# Altium PCB fat94.PcbDoc
Units mm, origin at the board's own origin, x right, y up, seen from the top; angles counter-clockwise.
Board outline 354.7 x 156.7 mm, 2 copper layers (Top Layer, Bottom Layer); 41 components, 615 nets, 130 pads, 52 vias.
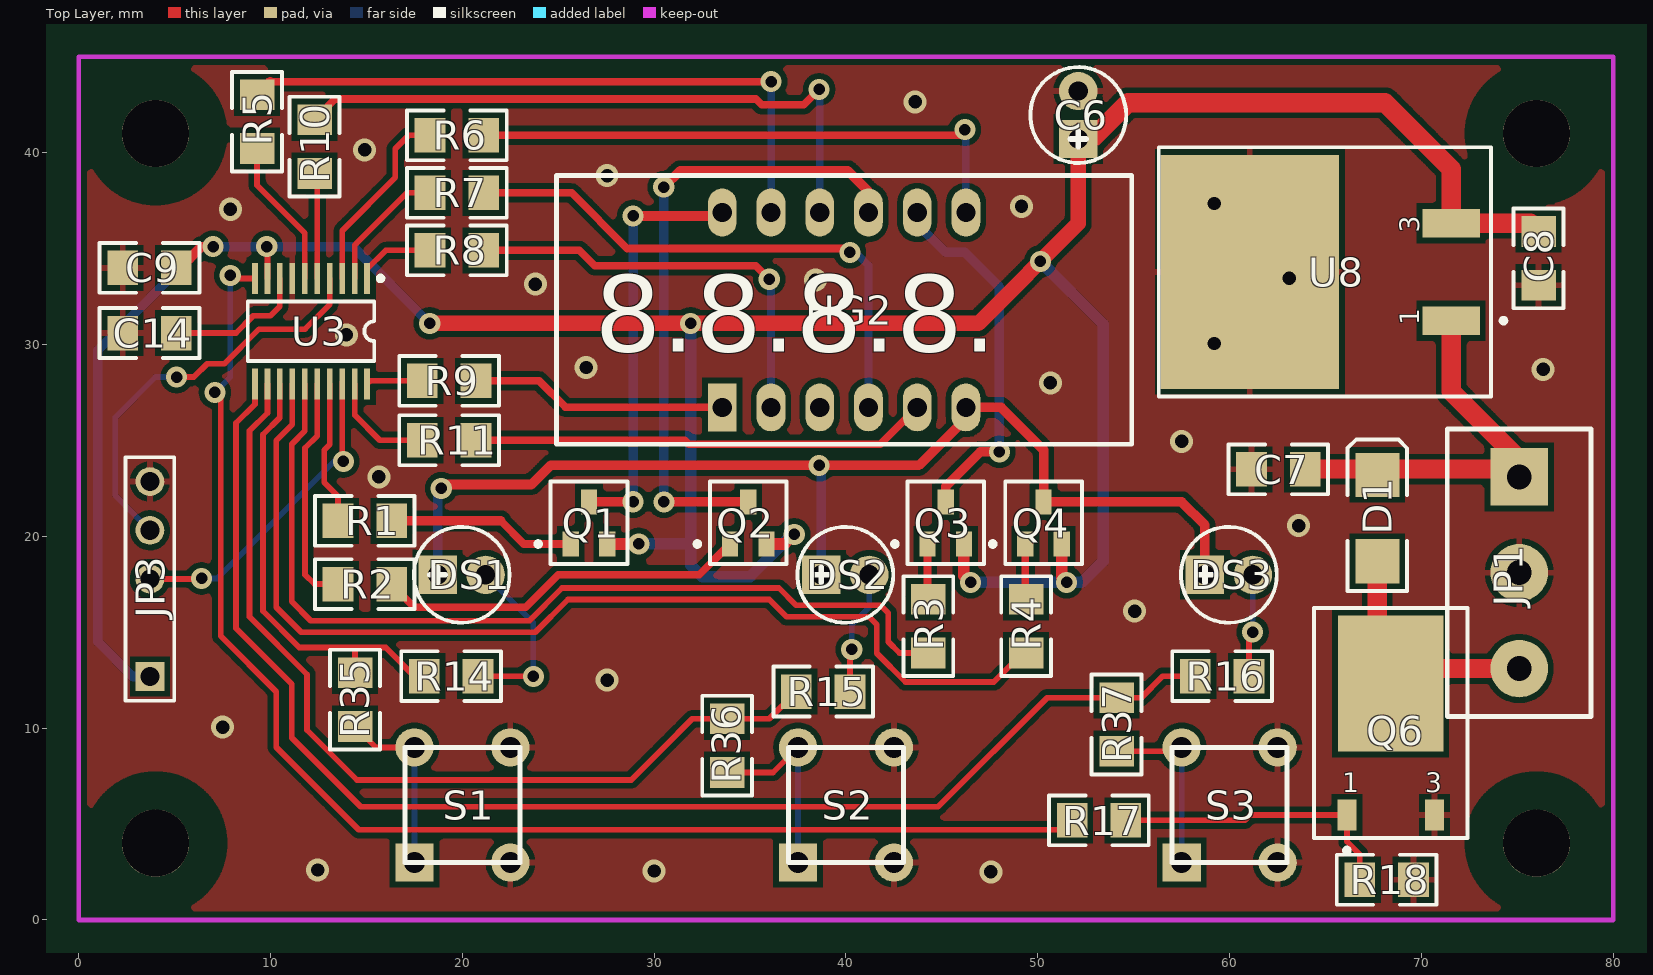
[diagram p0: Top Layer view]
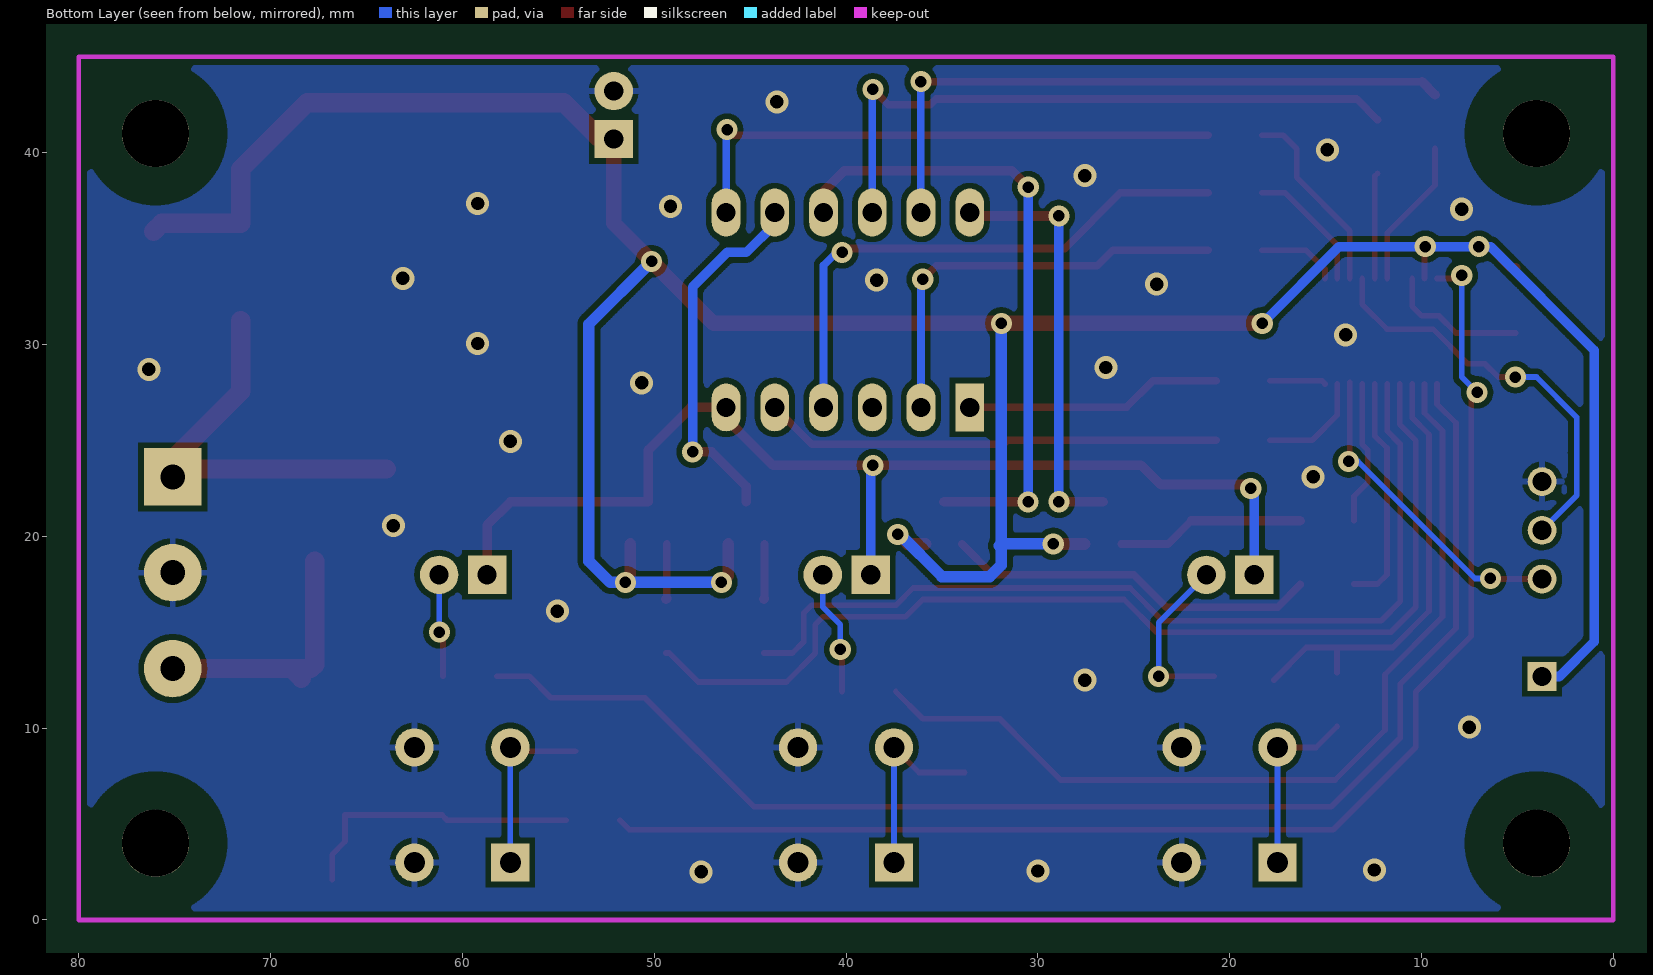
[diagram p1: Bottom Layer view, seen from below]

## Layer stack, top to bottom
Top Layer: signal copper 0.0356
Dielectric: dielectric 0.32, FR-4, Dk 4.8
Bottom Layer: signal copper 0.0356

## Board outline
-43.5,120.65 -43.5,-36.05 310.5,-36.05 310.5,116.5 -43.85,116.5 -43.85,-36.05 -44.2,-36.05

## Design rules (kind name [scope] priority, off if disabled: settings)
Clearance Clearance_1 [InPoly vs HasPad('Free-0')] p1: gap=2
Clearance Keep_Out [OnLayer('Keep-Out Layer')] p2: gap=0.3
Clearance Poly [InPoly] p3: gap=0.3
Clearance [All] p4: gap=0.2
ComponentClearance [All] p1: gap=0.254 collisioncheckmode=0
HoleSize [All] p1: absolutevalues=TRUE maxlimit=5 minlimit=0.025 maxpercent=80.000 minpercent=20.000
PolygonConnect PolygonConnect_1 [InComponent(U2)] p1: connectstyle=Direct reliefconductorwidth=0.254 reliefentries=4 polygonreliefangle="90 Angle"
PolygonConnect [All] p2: connectstyle=Relief reliefconductorwidth=0.3 reliefentries=4 polygonreliefangle="90 Angle"
RoutingLayers [All] p1: top layer=Horizontal bottom layer=Vertical
RoutingVias [All] p1: holewidth=0.6 width=1.1 viastyle="Through Hole" minholewidth=0.6 minwidth=1.1 maxholewidth=0.7 maxwidth=1.2
SolderMaskExpansion [All] p1: expansion=0.102
TestPointUsage [All] p1: valid=0 allowmultiple=FALSE
Testpoint [All] p1: side=15 testpointundercomponent=TRUE minsize=1.016 maxsize=2.54 preferedsize=1.524 minholesize=0 maxholesize=1.016 preferedholesize=0.813 testpointgrid=0.025 style=1023 order=1234567890
Width [All] p1: maxlimit=2 minlimit=0.2 preferedwidth=0.254 toplayer_prefwidth=0.4 bottomlayer_prefwidth=0.6 minimp=50.000000 maximp=50.000000 favimp=50.000000
15 further rules are at their usual default settings.

## Components (designator, comment, footprint, x,y, rotation, side; value= is the part's Value field where it differs from the comment)
C6 "" el3 52.1,40.7 r90 top
C7 "1.0 x 25" _1206 62.55,23.5 r0 top
C8 "20.0 x 25" _1206 76.1,34.5 r90 top
C9 "20.0 x 25" _1206 3.7,34 r0 top
C14 "1.0 x 25" _1206 3.7,30.6 r0 top
D1 "STPS1H100" DSO-C2/X2.3 67.7,20.95 r90 top
DS1 "LED0" el3 18.7,18 r0 top
DS2 "LED0" el3 38.7,18 r0 top
DS3 "LED0" el3 58.7,18 r0 top
HG2 "HS410561K" KEM-3461BS 39.9,31.8 r0 top
JP1 "Header 3" BT5-3 75.1,23.1 r270 top
JP3 "" HDR1X5_uart 3.7,12.7 r90 top
Q1 "BC807" SO-G3 26.6,20.7 r0 top
Q2 "BC807" SO-G3 34.9,20.7 r0 top
Q3 "BC807" SO-G3 45.2,20.7 r0 top
Q4 "BC807" SO-G3 50.3,20.7 r0 top
Q6 "IRLR120" SIP-G3/E8 68.4,8.9 r0 top
R1 "3K0" _1206 14.9,20.8 r180 top
R2 "3K0" _1206 14.9,17.5 r180 top
R3 "3K0" _1206 44.3,15.3 r270 top
R4 "3K0" _1206 49.4,15.3 r270 top
R5 "100R" _1206 9.3,41.6 r270 top
R6 "100R" _1206 19.7,40.9 r180 top
R7 "100R" _1206 19.7,37.9 r180 top
R8 "100R" _1206 19.7,34.9 r180 top
R9 "100R" _1206 19.3,28.1 r180 top
R10 "100R" _1206 12.3,40.3 r270 top
R11 "100R" _1206 19.3,25 r180 top
R14 "100R" _1206 19.4,12.7 r180 top
R15 "100R" _1206 38.8,11.9 r180 top
R16 "100R" _1206 59.6,12.7 r180 top
R17 "1K0" _1206 53.2,5.2 r0 top
R18 "10K" _1206 68.2,2.1 r0 top
R35 "30R" _1206 14.4,11.5 r90 top
R36 "30R" _1206 33.8,9.1 r90 top
R37 "30R" _1206 54.1,10.2 r90 top
S1 "SWT-6" SWT-6 17.5,3 r90 top
S2 "SWT-6" SWT-6 37.5,3 r90 top
S3 "SWT-6" SWT-6 57.5,3 r90 top
U3 "STM8S003F3P6" TSSO6x6-G20/Y1.6 12.1,30.7 r180 top
U8 "MC7805ACD2T" D2PAK 66.3,33.8 r90 top

## Footprints (in the part's own frame and the unit in brackets; to place one, negate y for a bottom-side part, rotate by r counter-clockwise, add the part's x,y. Pads: shape width x height; smd on the part's side, far side on the other; paste and mask are expansions set on the pad)
_1206 [mm]
  rect 1.6x1.8 smd: 1(-1.412,-0.007) 2(1.388,-0.007)
  silkscreen extent -2.61,-1.31 2.59,1.29
BT5-3 [mm]
  round 2 on Top Overlay: 0(-0.001,-4.001)
  rect 3x3 hole 1.3: 1(-0.001,-0.001)
  round 3 hole 1.3: 2(4.999,-0.001) 3(9.999,-0.001)
  silkscreen extent -2.5,-3.75 12.5,3.75
D2PAK [mm]
  rect 1.5x3 smd: 1(-2.558,-5.253) 3(2.522,-5.253)
  rect 12.2x9.3 smd: 4(-0.018,5.247)
  silkscreen extent -6.52,-8.1 6.48,10
DSO-C2/X2.3 [mm]
  rect 2.3x2.3 smd: 1(-2.25,0) 2(2.25,0)
  silkscreen extent -3.8,-1.55 4.1,1.55
el3 [mm]
  rect 2x2 hole 1: 1(0.011,-0.008)
  round 2 hole 1: 2(2.511,-0.008)
  silkscreen extent -1.24,-2.51 3.76,2.49
HDR1X5_uart [mm]
  rect 1.5x1.5 hole 1: 1(-0.008,-0.009)
  round 1.5 hole 1: 3(5.072,-0.009) 4(7.612,-0.009) 5(10.152,-0.009)
  silkscreen extent -1.28,-1.28 11.42,1.26
KEM-3461BS [mm]
  rect 1.5x2.5 hole 1: 1(-6.35,-5.08)
  oval 1.5x2.5 hole 1: 2(-3.81,-5.08) 3(-1.27,-5.08) 4(1.27,-5.08) 5(3.81,-5.08) 6(6.35,-5.08) 7(6.35,5.08) 8(3.81,5.08) 9(1.27,5.08) 10(-1.27,5.08) 11(-3.81,5.08) 12(-6.35,5.08)
  silkscreen extent -15,-7 15,7
SIP-G3/E8 [mm]
  rect 1x1.6 smd: 1(-2.285,-3.431) 3(2.285,-3.431)
  rect 5.5x7.1 smd: 4(0,3.419)
  silkscreen extent -4,-5.41 4,7.37
SO-G3 [mm]
  rect 0.85x1.3 smd: 1(-0.948,-1.102) 2(0.952,-1.102) 3(0.002,1.098)
  silkscreen extent -2.77,-2.15 2,2.15
SWT-6 [mm]
  rect 2x2 hole 1.1: 1(-0.009,-0.001)
  round 2 hole 1.1: 1(5.991,-0.001) 2(-0.009,-5.001) 2(5.991,-5.001)
  silkscreen extent -0.01,-5.5 5.99,0.5
TSSO6x6-G20/Y1.6 [mm]
  rect 0.3x1.6 smd: 1(-2.934,-2.743) 2(-2.284,-2.743) 3(-1.634,-2.743) 4(-0.984,-2.743) 5(-0.334,-2.743) 6(0.316,-2.743) 7(0.966,-2.743) 8(1.616,-2.743) 9(2.266,-2.743) 10(2.916,-2.743) 11(2.916,2.757) 12(2.266,2.757) 13(1.616,2.757) 14(0.966,2.757) 15(0.316,2.757) 16(-0.334,2.757) 17(-0.984,2.757) 18(-1.634,2.757) 19(-2.284,2.757) 20(-2.934,2.757)
  silkscreen extent -3.76,-2.87 3.29,1.56

## Part data
C6: library part "Cap Pol", "Polarized Capacitor (Radial)"
C7 C8 C9: library part Cap, "Capacitor"
C14: library part "Cap Semi", "Capacitor"
D1: library part 10BQ015, "Schottky Rectifier"
DS1 DS2 DS3: "Typical INFRARED GaAs LED"
JP1: "Header, 3-Pin"
JP3: library part SWIM_CONN
Q1 Q2 Q3 Q4: library part BC857ALT1, "General Purpose Transistor PNP Silicon"
Q6: library part IRFR120, "HEXFET N-Channel Power MOSFET"
R1 R2 R3 R4 R5 R6 R7 R8 R9 R10 R11 R14 R15 R16 R17 R18 R35 R36 R37: library part Res2, "Resistor"
S1 S2 S3: "Switch"
U3: library part STM8S103F
U8: "Three-Terminal Positive Voltage Regulator"

## Free pads (board coordinates)
  round 3.5 hole 3.5: 0(4,4) 0(4,41) 0(76,4) 0(76,41)

## Via types
v1: diameter 1.1, hole 0.6, Top Layer to Bottom Layer, 29 vias
v2: diameter 1.2, hole 0.7, Top Layer to Bottom Layer, 23 vias

## Nets (pads, with @x,y where several pads share a name; then routed paths per layer and width w, separated by ;. In a path a pad name is that pad's centre, name@x,y a point inside that pad or via, vN(x,y) a via of type N, cw(c..) or ccw(c..) an arc to the next point about the centre after c; other vN are vias at no path point)
+5V: C6.1 C8.2 C9.2 JP3.1 Q1.2 Q2.2 Q3.2 Q4.2 U3.9 U8.3 | length 167.4
  Top Layer w0.3: v1(9.8,35.1) 9.834,35.066 U3.9
  Top Layer w0.5: C9.2 5.293,33.993 6.4,35.1 v1(7,35.1)
  Top Layer w0.6: Q1.2 v1@29.198,19.598 ; Q2.2 36.798,19.598 v1(37.3,20.1) ; Q3.2 46.152,17.948 v1(46.5,17.6) ; Q4.2 51.252,17.848 v1(51.5,17.6)
  Top Layer w0.8: v1(18.3,31.1) 46.9,31.1 52.108,36.308 C6.1 ; v1(29.196,19.6) v1@29.198,19.598
  Top Layer w1: C6.1 52.211,40.814 52.914,40.814 54.7,42.6 68.1,42.6 71.553,39.147 U8.3 75.672,36.322 C8.2
  Bottom Layer w0.5: JP3.1 2.808,12.692 1,14.5 1,29.7 6.4,35.1 14.3,35.1 v1(18.3,31.1)
  Bottom Layer w0.6: v1(29.196,19.6) 31.9,19.6 32,19.5 ; v1(31.9,31.1) 31.9,18.5 32.5,17.9 35,17.9 37.2,20.1 v1(37.3,20.1) ; v1(46.5,17.6) 52.3,17.6 53.4,18.7 53.4,31.064 v1(50.132,34.332)
A: HG2.11 R5.1 | length 33.9
  Top Layer w0.4: R5.1@9.981,43.7 v1(36.1,43.7)
  Top Layer w0.5: R5.1 R5.1@9.981,43.7
  Bottom Layer w0.4: HG2.11 36.1,36.89 v1(36.1,43.7)
A1: HG2.12 Q1.3 | length 21.9
  Top Layer w0.5: Q1.3 28.902,21.798 v1(28.9,21.8) ; v1(28.9,36.7) 33.3,36.7 HG2.12@33.5,36.9
  Bottom Layer w0.5: v1(28.9,21.8) v1(28.9,36.7)
A2: HG2.9 Q2.3 | length 33.4
  Top Layer w0.5: v1@30.5,21.8 v1(30.502,21.798) Q2.3 ; v1(30.5,38.2) 31.35,39.05 40.1,39.05 41.17,37.98 HG2.9
  Bottom Layer w0.5: v1(30.5,38.2) 30.502,38.198 v1(30.502,21.798)
A3: HG2.8 Q3.3 | length 19.2
  Top Layer w0.5: Q3.3 45.202,22.602 47,24.4 v1(48,24.4)
  Bottom Layer w0.5: HG2.8 43.71,36.29 45.2,34.8 46.2,34.8 48,33 v1(48,24.4)
A4: DS1.1 DS2.1 DS3.1 HG2.6 Q4.3 | length 59
  Top Layer w0.5: v1(18.9,22.5) 19.1,22.7 23.6,22.7 24.6,23.7 43.8,23.7 46.25,26.15 HG2.6 48.08,26.72 50.302,24.498 Q4.3 57.502,21.798 58.711,20.589 DS3.1
  Bottom Layer w0.5: DS1.1 18.711,22.311 v1(18.9,22.5) ; v1(38.6,23.7) 38.711,23.589 DS2.1
B: HG2.7 R6.1 | length 29.5
  Top Layer w0.4: R6.1 45.907,40.907 v1(46.2,41.2)
  Bottom Layer w0.4: v1(46.2,41.2) 46.25,41.15 HG2.7
BAT: 
C: HG2.4 R7.1 | length 29
  Top Layer w0.4: R7.1 25.693,37.907 28.6,35 v1@40.3,35
  Bottom Layer w0.4: v1@40.3,35 41.17,34.13 HG2.4
  other v1: 40.2,34.8
C0: 
CAN: 
CS0: 
CS1: 
D: HG2.2 R8.1 | length 22.2
  Top Layer w0.4: R8.1 26.093,34.907 26.9,34.1 35.3,34.1 v1(36,33.4)
  Bottom Layer w0.4: v1(36,33.4) 36.09,33.31 HG2.2
D4: 
D7: 
D7: 
DT1: 
DT1: 
DT2: 
DT3: 
DT4: 
DT5: 
E: HG2.1 R9.1 | length 13.4
  Top Layer w0.4: R9.1 23.993,28.107 25.38,26.72 HG2.1
F: HG2.10 R10.1 | length 33.6
  Top Layer w0.4: R10.1 13.381,42.8 35.3,42.8 35.6,42.5 37.8,42.5 v1(38.6,43.3)
  Bottom Layer w0.4: v1(38.6,43.3) 38.63,43.27 HG2.10
G: HG2.5 R11.1 | length 23.9
  Top Layer w0.4: R11.1 31.6,25.007 31.807,24.8 41.79,24.8 HG2.5
GND: C6.2 C7.1 C8.1 C9.1 C14.1 JP1.2 JP3.5 Q6.3 R18.2 S1.2 S2.2 S3.2 U3.7 U8.4
  other v2: 47.55,2.5 30,2.55 12.45,2.6 7.5,10.05 27.55,12.5 55.05,16.1 63.6,20.55 15.65,23.1 57.5,24.95 50.65,28 76.35,28.7 26.45,28.8 59.2,30.05 13.95,30.5 23.8,33.15 38.4,33.35 63.1,33.45 7.9,37.05 49.15,37.2 59.2,37.35 27.55,38.8 14.9,40.15 43.6,42.65
H: HG2.3
I1: 
MISO: 
MOSI: 
NetA1_1: 
NetA1_1: 
NetA1_2: 
NetA1_2: 
NetA1_2: 
NetA1_2: 
NetA1_2: 
NetA1_2: 
NetA1_2: 
NetBT1_1: 
NetBT2_1: 
NetBT2_2: 
NetC1_2: 
NetC2_2: 
NetC3_1: 
NetC5_1: 
NetC5_2: 
NetC5_2: 
NetC5_2: 
NetC6_1: 
NetC6_2: 
NetC7_1: 
NetC7_2: 
NetC7_2: 
NetC7_2: C7.2 D1.2 JP1.1 U8.1 | length 20.9
  Top Layer w1: C7.2@63.95,23.5 74.707,23.493 JP1.1 75.099,24.001 71.553,27.547 U8.1
NetC8_1: 
NetC8_2: 
NetC11_2: 
NetC12_1: 
NetC12_2: 
NetC13_1: 
NetC14_1: 
NetC14_2: C14.2 U3.8 | length 7.4
  Top Layer w0.3: C14.2 8.193,30.593 9.1,31.5 10,31.5 10.484,31.984 U3.8
NetC21_2: 
NetC22_1: 
NetC22_2: 
NetC23_1: 
NetC30_2: 
NetC30_2: 
NetC31_2: 
NetC36_1: 
NetC45_1: 
NetC45_2: 
NetC46_1: 
NetC46_2: 
NetC47_2: 
NetC48_1: 
NetC48_2: 
NetC49_1: 
NetC50_2: 
NetC51_2: 
NetC52_2: 
NetC53_2: 
NetC61_1: 
NetC61_2: 
NetC62_2: 
NetC63_2: 
NetC66_1: 
NetC500_2: 
NetC502_1: 
NetC502_2: 
NetC505_1: 
NetC505_2: 
NetC508_1: 
NetC510_1: 
NetC511_1: 
NetC511_2: 
NetC512_2: 
NetC512_2: 
NetC512_2: 
NetC513_2: 
NetC514_1: 
NetC516_1: 
NetC516_2: 
NetC517_1: 
NetC517_1: 
NetC517_1: 
NetC600_1: 
NetC600_2: 
NetC?_2: 
NetD1_1: D1.1 JP1.3 Q6.4 | length 13.6
  Top Layer w1: D1.1 67.7,13.303 67.901,13.101 JP1.3 ; Q6.4@68.4,12.6 Q6.4@68.901,13.101
NetD2_1: 
NetD2_2: 
NetD2_4: 
NetD2_5: 
NetD3_1: 
NetD3_2: 
NetD4_2: 
NetD5_1: 
NetD5_1: 
NetD5_1: 
NetD6_2: 
NetD6_2: 
NetD6_2: 
NetD6_2: 
NetD20_2: 
NetD500_1: 
NetD500_2: 
NetD501_1: 
NetD503_1: 
NetD505_1: 
NetD505_1: 
NetD505_2: 
NetD506_1: 
NetD506_1: 
NetDS1_2: DS1.2 R14.1 | length 9.2
  Top Layer w0.3: R14.1 23.693,12.707 v1(23.7,12.7)
  Bottom Layer w0.3: DS1.2 23.7,15.503 v1(23.7,12.7)
NetDS2_2: DS2.2 R15.1 | length 6.5
  Top Layer w0.3: R15.1 40.212,14.012 v1(40.3,14.1)
  Bottom Layer w0.3: v1(40.3,14.1) 40.3,15.4 41.211,16.311 DS2.2
NetDS3_2: DS3.2 R16.1 | length 5.4
  Top Layer w0.3: R16.1 61.012,14.812 v1(61.2,15)
  Bottom Layer w0.3: v1(61.2,15) 61.211,15.011 DS3.2
NetFU500_1: 
NetHG1_3: 
NetHG2_3: 
NetHG3_3: 
NetHG4_3: 
NetJ1_2: 
NetJ1_2: 
NetJ1_2: 
NetJ1_3: 
NetJ1_3: 
NetJ1_3: 
NetJ1_4: 
NetJ1_4: 
NetJ1_7: 
NetJ1_7: 
NetJ1_8: 
NetJ2_1: 
NetJ4_1: 
NetJ4_2: 
NetJ600_1: 
NetJP1_1: 
NetJP1_1: 
NetJP1_3: 
NetJP1_3: 
NetJP1_4: 
NetJP1_7: 
NetJP1_10: 
NetJP2_2: 
NetJP2_2: 
NetJP2_3: 
NetJP3_1: 
NetJP3_2: 
NetJP3_2: 
NetJP3_3: 
NetJP3_3: 
NetJP3_3: 
NetJP3_4: 
NetJP3_5: 
NetJP3_5: 
NetJP3_7: 
NetJP3_9: 
NetJP4_1: 
NetJP4_2: 
NetJP4_8: 
NetJP4_9: 
NetJP4_10: 
NetJP5_2: 
NetJP5_5: 
NetJP5_6: 
NetJP5_7: 
NetJP5_9: 
NetJP5_10: 
NetJP5_11: 
NetJP5_12: 
NetJP5_13: 
NetJP5_14: 
NetJP5_15: 
NetJP5_16: 
NetJP5_17: 
NetJP5_18: 
NetJP5_19: 
NetJP5_20: 
NetJP6_2: 
NetJP6_17: 
NetJP7_2: 
NetJP7_2: 
NetJP7_2: 
NetJP7_5: 
NetJP8_3: 
NetJP8_4: 
NetJP8_5: 
NetJP8_6: 
NetJP10_1: 
NetJP10_2: 
NetJP10_3: 
NetJP10_4: 
NetJP100_2: 
NetJP101_1: 
NetJP101_2: 
NetJP101_3: 
NetJP101_4: 
NetJP101_5: 
NetJP101_6: 
NetJP?_1: 
NetJP?_2: 
NetJP?_3: 
NetJP?_4: 
NetQ1_1: Q1.1 R1.1 | length 9.8
  Top Layer w0.4: 21.993,20.807 23.202,19.598 Q1.1
  Top Layer w0.5: R1.1 21.993,20.807
NetQ1_1: 
NetQ1_1: 
NetQ1_2: 
NetQ1_3: 
NetQ2_1: Q2.1 R2.1 | length 19.5
  Top Layer w0.4: R2.1 16.312,17.488 17.5,16.3 23.3,16.3 25,18 32.354,18 Q2.1
NetQ2_1: 
NetQ2_3: 
NetQ2_3: 
NetQ3_1: Q3.1 R3.1 | length 2.9
  Top Layer w0.4: R3.1@44.252,16.754 Q3.1
  Top Layer w0.5: R3.1@44.252,16.754 R3.1
NetQ3_1: 
NetQ3_1: 
NetQ3_3: 
NetQ4_1: Q4.1 R4.1 | length 2.9
  Top Layer w0.4: R4.1@49.352,16.754 Q4.1
  Top Layer w0.5: R4.1@49.352,16.754 R4.1
NetQ4_1: 
NetQ4_3: 
NetQ5_1: 
NetQ6_1: 
NetQ6_1: Q6.1 R17.2 R18.1 | length 15.3
  Top Layer w0.3: R17.2 60.793,5.193 61.069,5.469 Q6.1 66.115,4.085 66.788,3.412 R18.1
NetQ6_1: 
NetQ6_1: 
NetQ7_1: 
NetQ7_2: 
NetQ7_2: 
NetQ7_4: 
NetQ7_4: 
NetQ8_1: 
NetQ8_2: 
NetQ8_4: 
NetQ9_1: 
NetQ9_2: 
NetQ9_4: 
NetQ10_1: 
NetQ10_1: 
NetQ10_3: 
NetQ10_3: 
NetQ11_1: 
NetQ11_1: 
NetQ11_3: 
NetQ12_1: 
NetQ13_1: 
NetQ500_1: 
NetQ501_1: 
NetQ600_1: 
NetQ600_3: 
NetQ?_1: 
NetQ?_1: 
NetQ?_1: 
NetQ?_1: 
NetQ?_1: 
NetQ?_1: 
NetR1_1: 
NetR3_1: 
NetR3_2: 
NetR3_2: 
NetR3_2: 
NetR4_1: 
NetR4_2: 
NetR5_1: 
NetR6_1: 
NetR7_1: 
NetR7_2: 
NetR8_1: 
NetR8_1: 
NetR8_2: 
NetR8_2: 
NetR13_2: 
NetR14_2: 
NetR15_2: 
NetR16_1: 
NetR16_1: 
NetR16_2: 
NetR17_2: 
NetR18_1: 
NetR18_2: 
NetR19_2: 
NetR20_2: 
NetR22_2: 
NetR22_2: 
NetR22_2: 
NetR22_2: 
NetR22_2: 
NetR22_2: 
NetR22_2: 
NetR22_2: 
NetR22_2: 
NetR25_1: 
NetR29_1: 
NetR30_2: 
NetR31_2: 
NetR33_2: 
NetR35_1: R35.1 S1.1 | length 9.5
  Top Layer w0.3: R35.1 15.503,8.991 S1.1@17.501,8.991
  Bottom Layer w0.3: S1.1@17.501,2.991 S1.1@17.501,8.991
NetR36_1: R36.1 S2.1 | length 10.2
  Top Layer w0.3: R36.1 36.197,7.688 S2.1@37.501,8.991
  Bottom Layer w0.3: S2.1@37.501,2.991 S2.1@37.501,8.991
NetR37_1: R37.1 S3.1 | length 9.5
  Top Layer w0.3: R37.1 57.297,8.788 S3.1@57.501,8.991
  Bottom Layer w0.3: S3.1@57.501,2.991 S3.1@57.501,8.991
NetR38_1: 
NetR42_1: 
NetR42_2: 
NetR43_1: 
NetR43_2: 
NetR43_2: 
NetR44_1: 
NetR44_2: 
NetR44_2: 
NetR45_2: 
NetR49_1: 
NetR49_2: 
NetR51_1: 
NetR51_2: 
NetR52_1: 
NetR53_1: 
NetR57_1: 
NetR60_1: 
NetR69_2: 
NetR83_2: 
NetR90_2: 
NetR91_1: 
NetR93_1: 
NetR95_1: 
NetR96_2: 
NetR504_1: 
NetR505_2: 
NetR505_2: 
NetR510_1: 
NetR600_1: 
NetR600_2: 
NetR603_1: 
NetR603_2: 
NetR605_2: 
NetR?_1: 
NetS2_1: 
NetU1_1: 
NetU1_2: 
NetU1_5: 
NetU5_1: 
NetU8_3: 
NetU8_7: 
NetU8_8: 
NetU11_5: 
NetU14_3: 
NetU14_4: 
NetU14_5: 
NetU14_6: 
NetU14_12: 
NetU14_13: 
NetU14_14: 
NetU15_3: 
NetU15_3: 
NetU15_3: 
NetU15_3: 
NetU15_4: 
NetU15_5: 
NetU15_5: 
NetU15_5: 
NetU15_5: 
NetU15_5: 
NetU15_5: 
NetU15_7: 
NetU15_7: 
NetU15_9: 
NetU15_10: 
NetU15_15: 
NetU16_3: 
NetU16_4: 
NetU16_6: 
NetU18_1: 
NetU18_2: 
NetU21_1: 
NetU21_2: 
NetU503_4: 
NetU600_3: 
NetX13_1: 
NetX15_1: 
NetX23_1: 
NetX32_1: 
NetX33_1: 
OFF1: 
OFF2: 
P0_0: 
P0_1: 
P0_2: 
P0_3: 
P0_4: 
P0_5: 
P0_6: 
P0_7: 
P0_8: 
P0_8_: 
P0_8_: 
P0_8_: 
P0_9: 
P0_9_: 
P0_9_: 
P0_9_: 
P0_9_: 
P0_10: 
P0_11: 
P0_12: 
P0_13: 
P0_14: 
P0_15: 
P0_16: 
P0_17: 
P0_18: 
P0_19: 
P0_19: 
P0_20: 
P0_21: 
P0_22: 
P0_22: 
P0_22: 
P0_23: 
P0_24: 
P0_25: 
P0_27: 
P0_28: 
P0_29: 
P0_30: 
P1_16: 
P1_17: 
P1_18: 
P1_19: 
P1_20: 
P1_21: 
P1_21: 
P1_22: 
P1_23: 
P1_24: 
P1_25: 
P1_26: 
P1_27: 
P1_28: 
P1_29: 
P1_30: 
P1_31: 
PA0: 
PA1: R10.2 U3.5 | length 5.5
  Top Layer w0.3: R10.2 12.434,38.772 U3.5
PA2: 
PA2: 
PA2: R5.2 U3.6 | length 7.8
  Top Layer w0.3: R5.2 9.293,38.307 11.784,35.816 U3.6
PA3: R17.1 U3.10 | length 71.1
  Top Layer w0.3: v1(7.1,27.5) 7.4,27.2 7.4,14.8 10.3,11.9 10.3,9 14.6,4.7 51.294,4.7 R17.1 ; v1(7.9,33.6) 8.057,33.443 U3.10
  Bottom Layer w0.3: v1(7.1,27.5) 7.9,28.3 v1(7.9,33.6)
PA4: 
PA5: 
PA7: 
PA9: 
PA10: 
PA13: 
PA14: 
PA15: 
PB1: 
PB1: 
PB2: 
PB2: 
PB3: 
PB3: 
PB4: R15.2 R36.2 U3.12 | length 48.2
  Top Layer w0.3: U3.12 9.834,26.434 8.9,25.5 8.9,15.8 11.9,12.8 11.9,9.9 14.5,7.3 28.8,7.3 30.426,8.926 31.988,10.488 35.993,10.488 R15.2
PB5: R16.2 R37.2 U3.11 | length 71.5
  Top Layer w0.3: U3.11 9.184,26.884 8.2,25.9 8.2,15.2 11.1,12.3 11.1,9.5 14.7,5.9 44.8,5.9 50.488,11.588 55.388,11.588 56.507,12.707 R16.2
PB6: 
PB7: 
PB10: 
PB11: 
PB12: 
PB13: 
PB14: 
PB15: 
PC0: 
PC1: 
PC2: 
PC3: 
PC3: R14.2 R35.2 U3.13 | length 23.1
  Top Layer w0.3: U3.13 10.484,26.184 9.6,25.3 9.6,16.1 11.5,14.2 16,14.2 R14.2@17.7,12.5 ; 14.4,14.2 14.407,14.193 R35.2
PC4: R4.2 U3.14 | length 55.6
  Top Layer w0.3: U3.14 11.134,25.834 10.3,25 10.3,16.3 11.6,15 23.8,15 25.5,16.7 36,16.7 36.9,15.8 41.2,15.8 41.6,15.4 41.6,13.9 43.1,12.4 47.7,12.4 49.212,13.912 R4.2
PC5: R3.2 U3.15 | length 48.2
  Top Layer w0.3: U3.15 11.784,25.484 11.1,24.8 11.1,16.6 12.1,15.6 23.5,15.6 25.2,17.3 36.5,17.3 37.4,16.4 41.8,16.4 42.2,16 42.2,14.5 42.788,13.912 R3.2
PC6: R2.2 U3.16 | length 12.1
  Top Layer w0.3: U3.16 12.434,25.234 11.8,24.6 11.8,18 12.293,17.507 R2.2
PC7: R1.2 U3.17 | length 7.5
  Top Layer w0.3: U3.17 13.084,24.784 12.8,24.5 12.8,22.8 13.512,22.088 R1.2
PC8: 
PC9: 
PC10: 
PC11: 
PD0: 
PD1: JP3.3 U3.18 | length 16.8
  Top Layer w0.3: JP3.3 v1@6.4,17.772 ; U3.18@13.734,28.034 13.734,23.966 v1(13.8,23.9)
  Bottom Layer w0.3: v1(6.4,17.8) 7.2,17.8 13.3,23.9 v1(13.8,23.9)
PD2: R11.2 U3.19 | length 5.7
  Top Layer w0.3: U3.19 14.384,26.316 15.693,25.007 R11.2
PD3: R9.2 U3.20 | length 2.9
  Top Layer w0.3: U3.20 15.197,28.107 R9.2
PD4: R8.2 U3.1 | length 4.2
  Top Layer w0.3: U3.1 15.034,33.934 16.007,34.907 R8.2
PD5: R7.2 U3.2 | length 6.8
  Top Layer w0.3: U3.2 14.384,35.184 17.107,37.907 R7.2
PD6: R6.2 U3.3 | length 10
  Top Layer w0.3: U3.3 13.734,35.934 16.5,38.7 16.5,40.2 17.207,40.907 R6.2
PE5: 
PE6: 
PE6: 
PE6: 
PE6: 
PE6: 
PE6: 
PE6: 
PE6: 
PE6: 
PE6: 
PE6: 
PE6: 
PE6: 
PE6: 
PE6: 
PE6: 
PE7: 
PF4: 
PQ1: 
PQ2: 
PQ3: 
PQ4: 
PQ5: 
PQ6: 
PROG0: 
PROG1: 
PROG1: 
PROG1: 
PWM: 
PWM0: 
PWM1: 
PWM2: 
REL1: 
REL1: 
REL2: 
REL3: 
REL4: 
REL5: 
REL6: 
RES: 
RST: JP3.4 U3.4 | length 21.6
  Top Layer w0.3: v1(5.1,28.3) 6,28.3 6.7,29 7.6,29 9.4,30.8 11.8,30.8 13.084,32.084 U3.4
  Bottom Layer w0.3: JP3.4 1.9,22.122 1.9,26.2 4,28.3 v1(5.1,28.3)
RST: 
RTX: 
RX: 
RXCAN: 
SA: 
SB: 
SC: 
SCK: 
SD: 
SE: 
SF: 
SG: 
SH: 
SK1: 
SK2: 
SK3: 
SK4: 
SWIM: 
T3: 
T3: 
TD1: 
TX: 
U2: 
U5: 
U6: 
U7: 
U8: 
UAKB: 
UB1: 
UB2: 
UBM1: 
UBM2: 
UIB1: 
UIB2: 
ULOAD: 
US: 
US1: 
US1: 
US1: 
US1: 
US1: 
US1: 
US1: 
US1: 
US1: 
UTX: 
UU1: 
UU2: 
UU3: 
UU4: 
UU5: 
UU6: 
UU7: 
UU8: 
UU9: 
UU10: 
UU11: 
UU12: 
UU13: 
UU14: 
VREF: 
VS: 
VS: 
pads on no net: JP1.0

## Polygon pours and split planes (outlines as drawn)
GND on Top Layer (hatched 90Degree grid 0.1 track 0.3, remove dead copper): -1.8,46.5 -1.8,-1.9 82.3,-1.9 82.3,46.9 -1.8,46.9
GND on Bottom Layer (hatched 90Degree grid 0.1 track 0.3, remove dead copper): -1.1,46.1 -1.1,-1.3 81.4,-1.3 81.4,46.3 -1.1,46.3

## Keep-outs
Keep-Out Layer:
  lines w0.254: 0,0 80,0 80,45 0,45 0,0

## Silkscreen, mask and mechanical layers (free items; w line width, h text height)
Mechanical 1:
  lines w0.254: -5.1,6 95.2,6 ; -4,18 84.5,18 ; 20,-4.2 20,51 ; 40,-4.9 40,54.4 ; 60,-4.8 60,49.3

## Dimensions
0,0 to 0,45 on Mechanical 1
0,0 to 4,41 on Mechanical 1
0,0 to 24.9,38.8 on Mechanical 1
0,0 to 24.9,24.8 on Mechanical 1
0,0 to -4,18 on Mechanical 1
0,0 to -5.1,6 on Mechanical 1
0,0 to 4,4 on Mechanical 1
0,45 to 54.9,38.8 on Mechanical 1
0,45 to 24.9,38.8 on Mechanical 1
0,0 to 80,0 on Mechanical 1
0,0 to 76,4 on Mechanical 1
0,0 to 60,-4.8 on Mechanical 1
0,0 to 40,-4.9 on Mechanical 1
0,0 to 20,-4.2 on Mechanical 1
0,0 to 4,4 on Mechanical 1

## Text inside footprints (layer, text, board x,y; h text height)
HG2: Top Overlay "8.8.8.8." at 26.9,29.625 h4
Q6: Top Overlay "1" at 65.86,6.644 h1; Top Overlay "3" at 70.188,6.644 h1
U8: Top Overlay "3" at 69.878,35.814 h1 r90; Top Overlay "1" at 69.878,30.992 h1 r90